# Altium PCB RightBar1_PcbDoc.PcbDoc
Units mil, origin at the board's own origin, x right, y up, seen from the top; angles counter-clockwise.
Board outline 11815 x 1400 mil, 2 copper layers (Top Layer, Bottom Layer); 8 components, 12 nets, 64 pads, 12 vias.
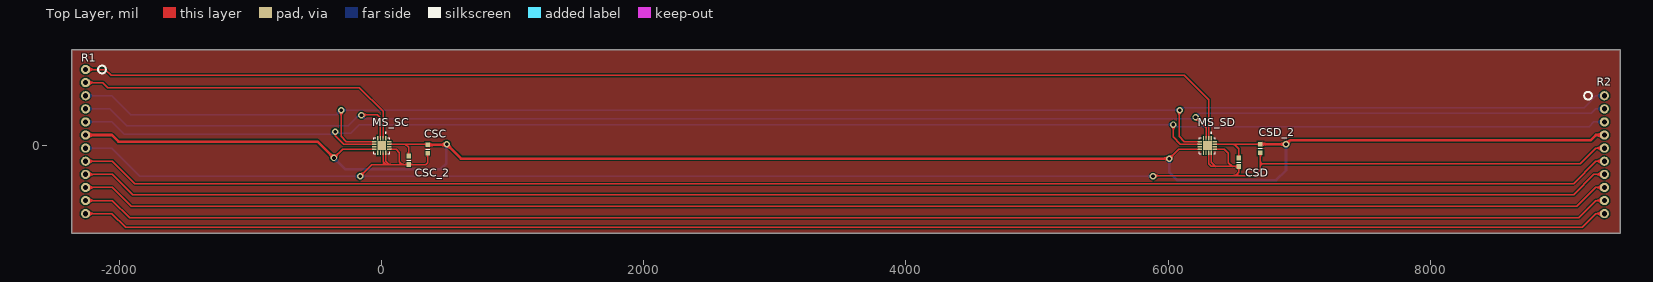
[diagram p0: Top Layer view]
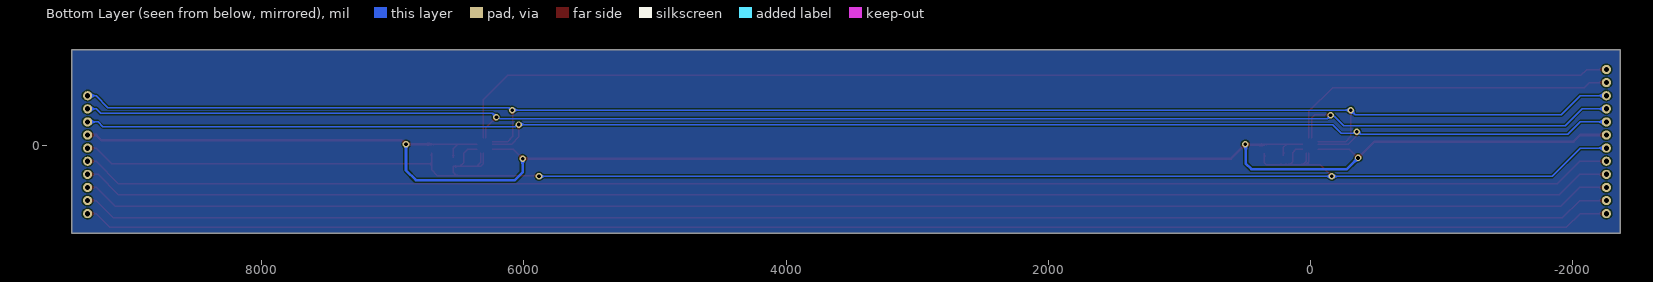
[diagram p1: Bottom Layer view, seen from below]
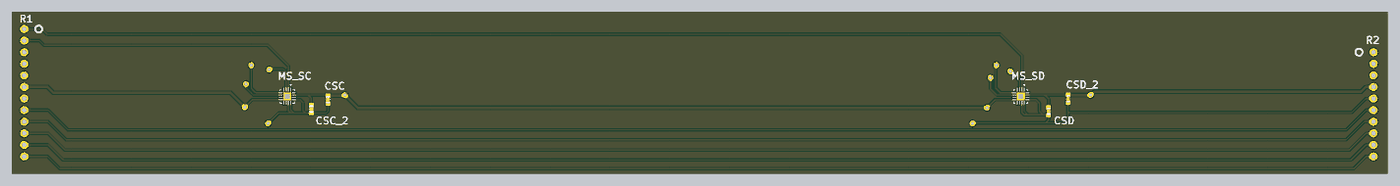
[diagram p2: 3D render of the assembled board from above, using the file's embedded part models]

## Layer stack, top to bottom
Top Solder: solder mask 0.4, Solder Resist, Dk 3.5
Top Layer: signal copper 1.4
Dielectric 1: dielectric 12.6, FR-4, Dk 4.8
Bottom Layer: signal copper 1.4
Bottom Solder: solder mask 0.4, Solder Resist, Dk 3.5

## Board outline
-2365,-670 9450,-670 9450,730 -2365,730

## Design rules (kind name [scope] priority, off if disabled: settings)
Clearance [All] p1: gap=10 ignorepadtopadclearanceinfootprint=FALSE except(0: Arc-Hole Track-Hole SMDPad-Hole THPad-Hole Via-Hole Fill-Hole Poly-Hole Region-Hole Text-Hole)
PolygonConnect [All] p1: connectstyle=Relief reliefconductorwidth=10 reliefentries=4 polygonreliefangle="90 Angle" airgapwidth=10
RoutingVias [All] p1: holewidth=28 width=50 viastyle="Through Hole" minholewidth=28 minwidth=50 maxholewidth=28 maxwidth=50
SolderMaskExpansion [All] p1: expansion=4 istentingtop=FALSE
Width [All] p1: maxlimit=10 minlimit=10 preferedwidth=10
30 further rules are at their usual default settings.

## Components (designator, comment, footprint, x,y, rotation, side; value= is the part's Value field where it differs from the comment)
CSC "0.1uF" CAP_0603 350,-27.5 r90 top
CSC_2 "0.1uF" CAP_0603 205,-112.5 r270 top
CSD "0.1uF" CAP_0603 6540,-127.5 r90 top
CSD_2 "0.1uF" CAP_0603 6705,-22.5 r270 top
MS_SC "MLX90393SLW ABA 011 RE" MLX90393 0,0 r270 top
MS_SD "MLX90393SLW ABA 011 RE" MLX90393 6300,0 r270 top
R1 "PIN_right" PIN_RIGHT_1 -2260,80 r0 top (schematic designator CON_R_1)
R2 "PIN_right" PIN_RIGHT_2 9330,-120 r0 top (schematic designator CON_R_2)

## Footprints (in the part's own frame and the unit in brackets; to place one, negate y for a bottom-side part, rotate by r counter-clockwise, add the part's x,y. Pads: shape width x height; smd on the part's side, far side on the other; paste and mask are expansions set on the pad)
CAP_0603 [mil]
  rect 35x35 smd: 1(-32.5,0) 2(32.5,0)
  silkscreen extent 0,-16 0,14, body extent -53,-18 49,21, height 35
MLX90393 [mm]
  rrect25% 0.86x0.26 smd: 1(-1.435,0.75) 2(-1.435,0.25) 3(-1.435,-0.25) 4(-1.435,-0.75) 9(1.435,-0.75) 10(1.435,-0.25) 11(1.435,0.25) 12(1.435,0.75)
  rrect25% 0.26x0.86 smd: 5(-0.75,-1.435) 6(-0.25,-1.435) 7(0.25,-1.435) 8(0.75,-1.435) 13(0.75,1.435) 14(0.25,1.435) 15(-0.25,1.435) 16(-0.75,1.435)
  rect 1.71x1.71 smd paste-2: 17(0,0)
  silkscreen extent -2.59,-1.55 1.55,1.55
PIN_RIGHT_1 [mil]
  round 70 hole 40: 1(0,500) 2(0,400) 3(0,300) 4(0,200) 5(0,100) 6(0,0) 7(0,-100) 8(0,-200) 9(0,-300) 10(0,-400) 11(0,-500) 12(0,-600)
  silkscreen extent 95,470 155,530
PIN_RIGHT_2 [mil]
  round 70 hole 40: 1(0,500) 2(0,400) 3(0,300) 4(0,200) 5(0,100) 6(0,0) 7(0,-100) 8(0,-200) 9(0,-300) 10(0,-400)
  silkscreen extent -155,470 -95,530

## Part data
CSC CSC_2 CSD CSD_2: library part CAP, "Capacitance"
MS_SC MS_SD: "MLX90393 Sensor"
R2: library part PIN_right_2

## Via types
v1: diameter 50, hole 28, Top Layer to Bottom Layer, 12 vias

## Nets (pads, with @x,y where several pads share a name; then routed paths per layer and width w, separated by ;. In a path a pad name is that pad's centre, name@x,y a point inside that pad or via, vN(x,y) a via of type N, cw(c..) or ccw(c..) an arc to the next point about the centre after c; other vN are vias at no path point)
7: R1.11 R2.9 | length 11697.7
  Top Layer w10: R1.11 -2055,-420 -1925,-550 9135,-550 9265,-420 R2.9
11: R1.10 R2.8 | length 11710.1
  Top Layer w10: R1.10 -2055,-320 -1910,-465 9120,-465 9265,-320 R2.8
15: R1.12 R2.10 | length 11677
  Top Layer w10: R1.12 -2060,-520 -1955,-625 9160,-625 9265,-520 R2.10
27: R1.8 R2.6 | length 11730.8
  Top Layer w10: R1.8 -2055,-120 -1885,-290 9095,-290 9265,-120 R2.6
30: R1.9 R2.7 | length 11718.4
  Top Layer w10: R1.9 -2055,-220 -1900,-375 9095,-375 9250,-220 R2.7
GND: CSC.1 CSC_2.2 CSD.1 CSD_2.2 MS_SC.11 MS_SC.12 MS_SC.13 MS_SD.11 MS_SD.12 MS_SD.13 R1.7 R2.5 | length 13638.1
  Top Layer w10: v1(-165,-235) -75,-145 30,-145 ; MS_SC.11 9.84,-124.84 30,-145 ; MS_SC.12 29.53,-119.53 55,-145 ; MS_SC.13 56.97,-30 110,-30 135,-55 135,-125 155,-145 ; CSC.1 350,-130 335,-145 CSC_2.2 155,-145 ; v1(5885,-235) 5890,-230 6515,-230 ; MS_SD.11 6309.84,-139.84 6330,-160 6360,-160 ; MS_SD.12 6329.53,-129.53 6360,-160 ; MS_SD.13 6429.53,-29.53 6460,-60 6460,-130 6490,-160 ; CSD_2.2 6705,-140 ; R2.5 9265,-20 9145,-140 6705,-140 ; 30,-145 55,-145 ; 55,-145 155,-145 ; 6360,-160 6490,-160 ; 6490,-160 CSD.1 6540,-205 6515,-230 ; 6515,-230 6660,-230 6705,-185 6705,-140
  Bottom Layer w10: R1.7 -2060,-20 -1845,-235 v1(-165,-235) v1(5885,-235)
MISO: MS_SC.6 MS_SD.6 R1.5 R2.3 | length 12366.2
  Top Layer w10: v1(-355,105) -355,75 -289.84,9.84 MS_SC.6 ; v1(6040,160) 6040,65 6095,10 MS_SD.6@6243.5,10
  Bottom Layer w10: R1.5 -2060,180 -1965,85 -385.82,85 -365.82,105 v1(-355,105) -347.35,97.35 -331.49,97.35 -329.14,95 -235,95 -170,160 6050.82,160 6065.82,145 9215,145 9250,180 R2.3
MOSI: MS_SC.5 MS_SD.5 R1.3 R2.1 | length 12555.7
  Top Layer w10: v1(-310,268.5) -310,70 -269.96,29.96 MS_SC.5@-56.5,29.96 ; v1(6090,270) 6085,265 6085,70 6124.72,30.28 MS_SD.5@6243.5,30.28
  Bottom Layer w10: R1.3 -2060,380 -1915,235 -343.5,235 v1(-310,268.5) -308.5,270 v1(6090,270) 6095.86,270 6115.86,290 9175,290 9265,380 R2.1
SC: MS_SC.2 R1.2 | length 2564.6
  Top Layer w10: R1.2 -2130,480 -2090,440 -170,440 10,260 MS_SC.2@10,56.5
SCL: MS_SC.3 MS_SD.3 R1.4 R2.2 | length 12221.8
  Top Layer w10: v1(-155,230) -150,235 -35,235 -10.28,210.28 MS_SC.3@-10.28,56.5 ; v1(6210,215) 6289.72,135.28 MS_SD.3@6289.72,56.5
  Bottom Layer w10: R1.4 -2075,280 -1945,150 -255,150 -182.65,222.35 -162.65,222.35 v1(-155,230) -155,228.28 -131.72,205 6184.14,205 6186.49,207.35 6202.35,207.35 v1(6210,215) 6240,245 9230,245 9265,280 R2.2
SD: MS_SD.2 R1.1 | length 8958.8
  Top Layer w10: R1.1 -2110,580 -2065,535 6125,535 6310,350 MS_SD.2@6310,56.5
VCC: CSC.2 CSC_2.1 CSD.2 CSD_2.1 MS_SC.8 MS_SC.15 MS_SD.8 MS_SD.15 R1.6 R2.4 | length 14103.4
  Top Layer w10: v1(-365,-95) -299.53,-29.53 MS_SC.8 ; MS_SC.15 174.53,9.84 174.59,9.78 180.22,9.78 ; CSC_2.1 205,-15 180.22,9.78 ; CSC.2 345.22,9.78 180.22,9.78 ; v1@490,5 v1(495,10) ; v1(6010,-100) 6080.04,-29.96 MS_SD.8@6243.5,-29.96 ; MS_SD.15 6505.16,9.84 ; CSD.2 6540,-25 6505.16,9.84 ; CSD_2.1 6704.84,9.84 6505.16,9.84
  Top Layer w20: R1.6 -2060,80 -2010,30 -490,30 v1(-365,-95) ; CSC.2 v1@490,5 ; v1(495,10) 605,-100 v1(6010,-100) ; CSD_2.1 6901.72,10 6931.72,40 9225,40 9265,80 R2.4
  Bottom Layer w10: v1@-365,-100 v1(-365,-95) ; v1@492.5,5 495,7.5 v1(495,10)
  Bottom Layer w20: v1@-365,-100 -360,-100 -280,-180 450,-180 492.5,-137.5 v1@492.5,5 ; v1(6010,-100) 6010,-205 6070,-265 6825,-265 6900,-190 v1(6900,10)
pads on no net: MS_SC.1 MS_SC.4 MS_SC.7 MS_SC.9 MS_SC.10 MS_SC.14 MS_SC.16 MS_SC.17 MS_SD.1 MS_SD.4 MS_SD.7 MS_SD.9 MS_SD.10 MS_SD.14 MS_SD.16 MS_SD.17

## Polygon pours and split planes (outlines as drawn)
no net on Bottom Layer "NONET_L02_P014" (solid, pour order 14): -2365,730 -2365,-669.91 -2364.74,-670.17 -2364.57,-670 9450,-670 9450,730
no net on Bottom Layer "NONET_L02_P001" (solid, pour order 1): -2410,670
no net on Top Layer "NONET_L01_P015" (solid, pour order 15): 9450,730 9450,-670 -2365,-670 -2365,730

## Silkscreen, mask and mechanical layers (free items; w line width, h text height)
Mechanical 1:
  lines w10: -2365,-670 9450,-670 9450,670 9450,730 6240,730 -2365,730 -2365,-670